# EAGLE board PCB (EAGLE 9.7.0)
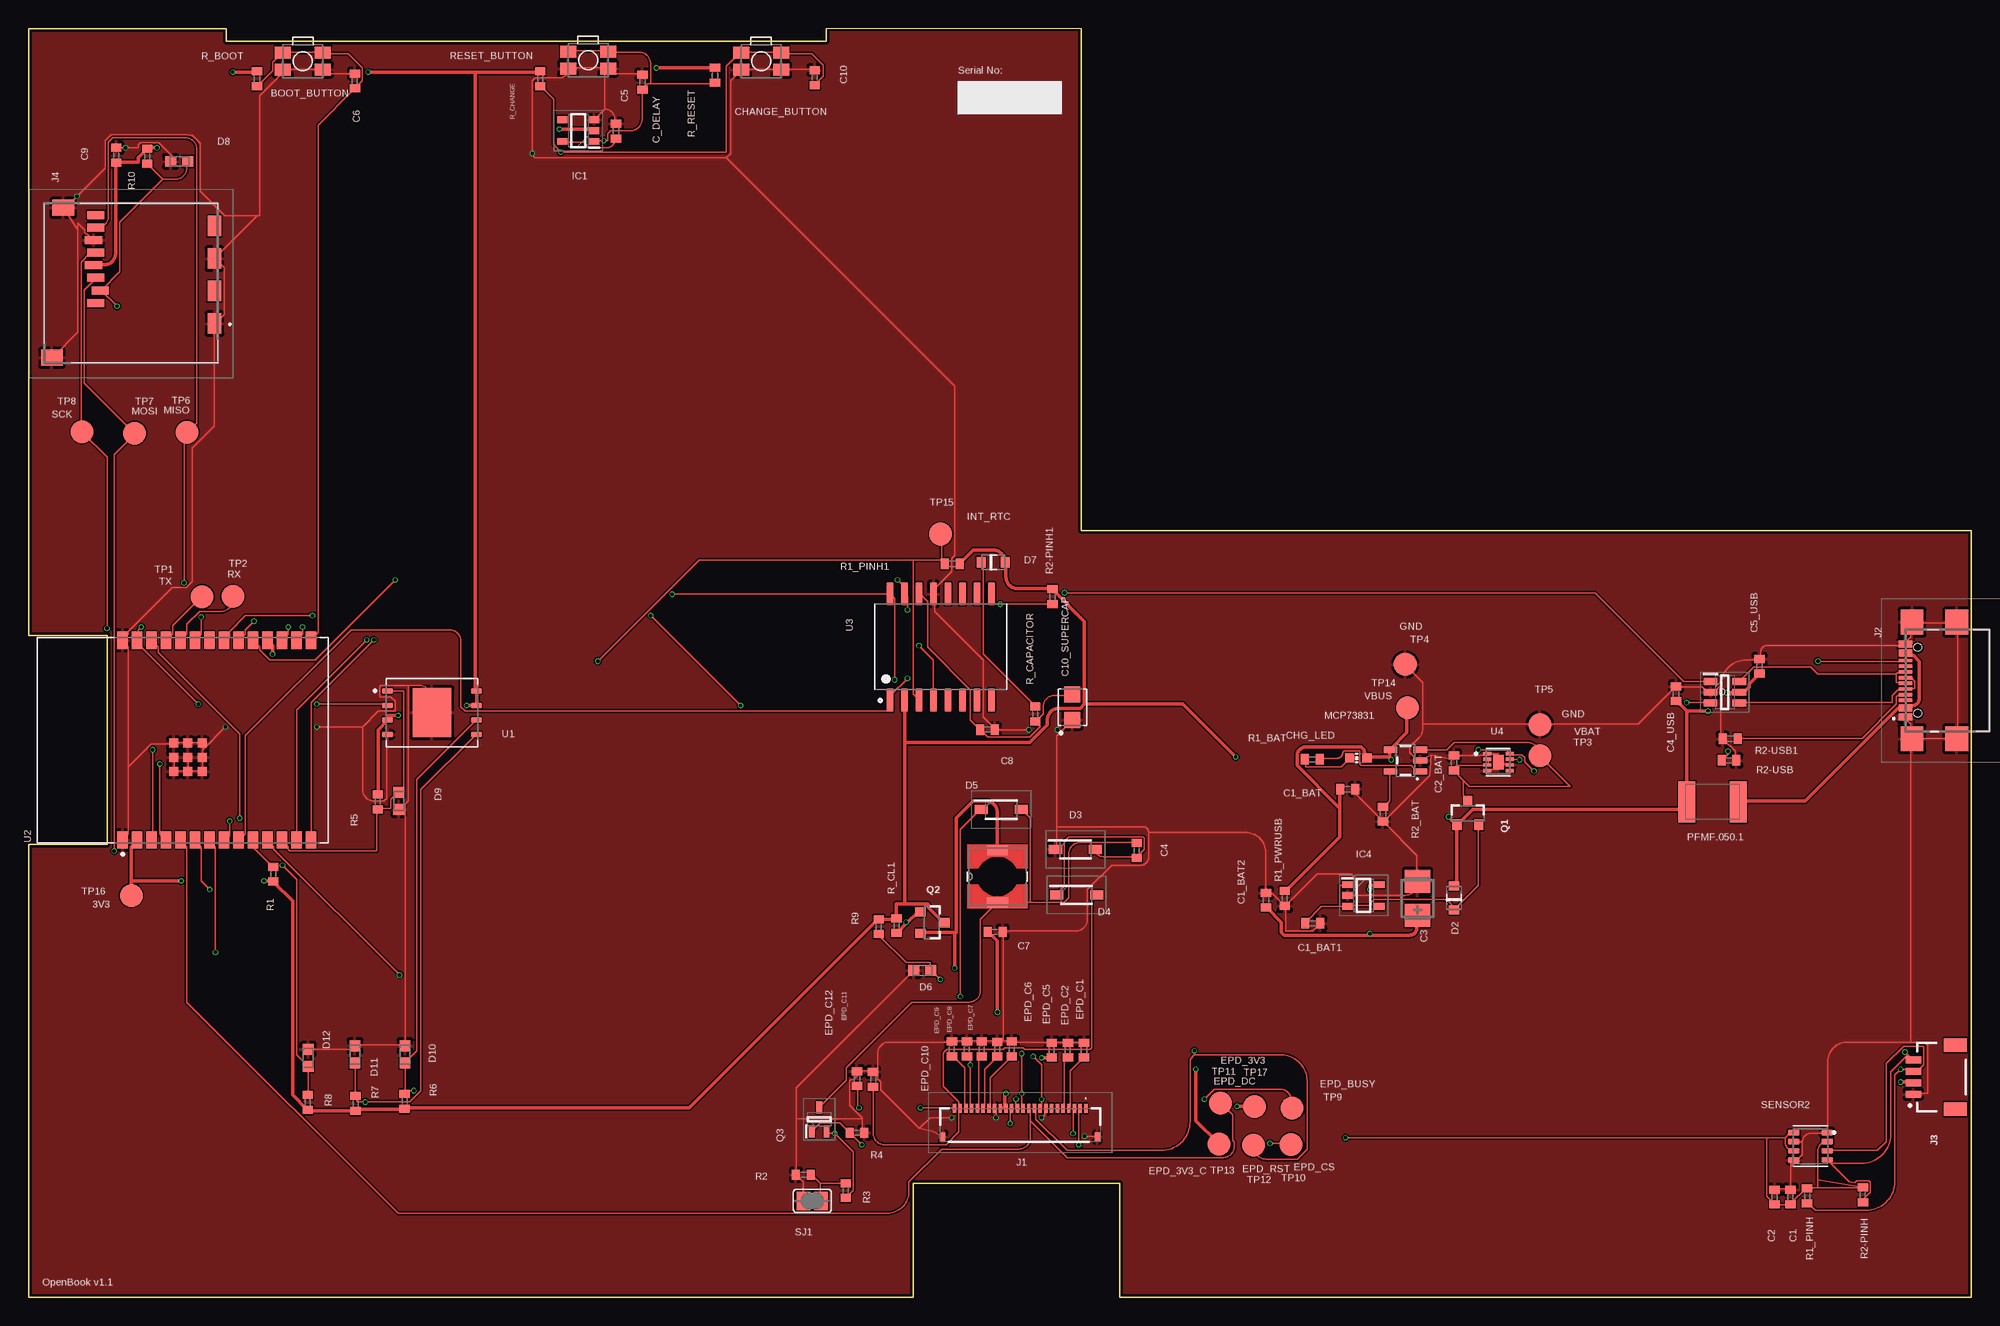
[diagram p0: board, top side]
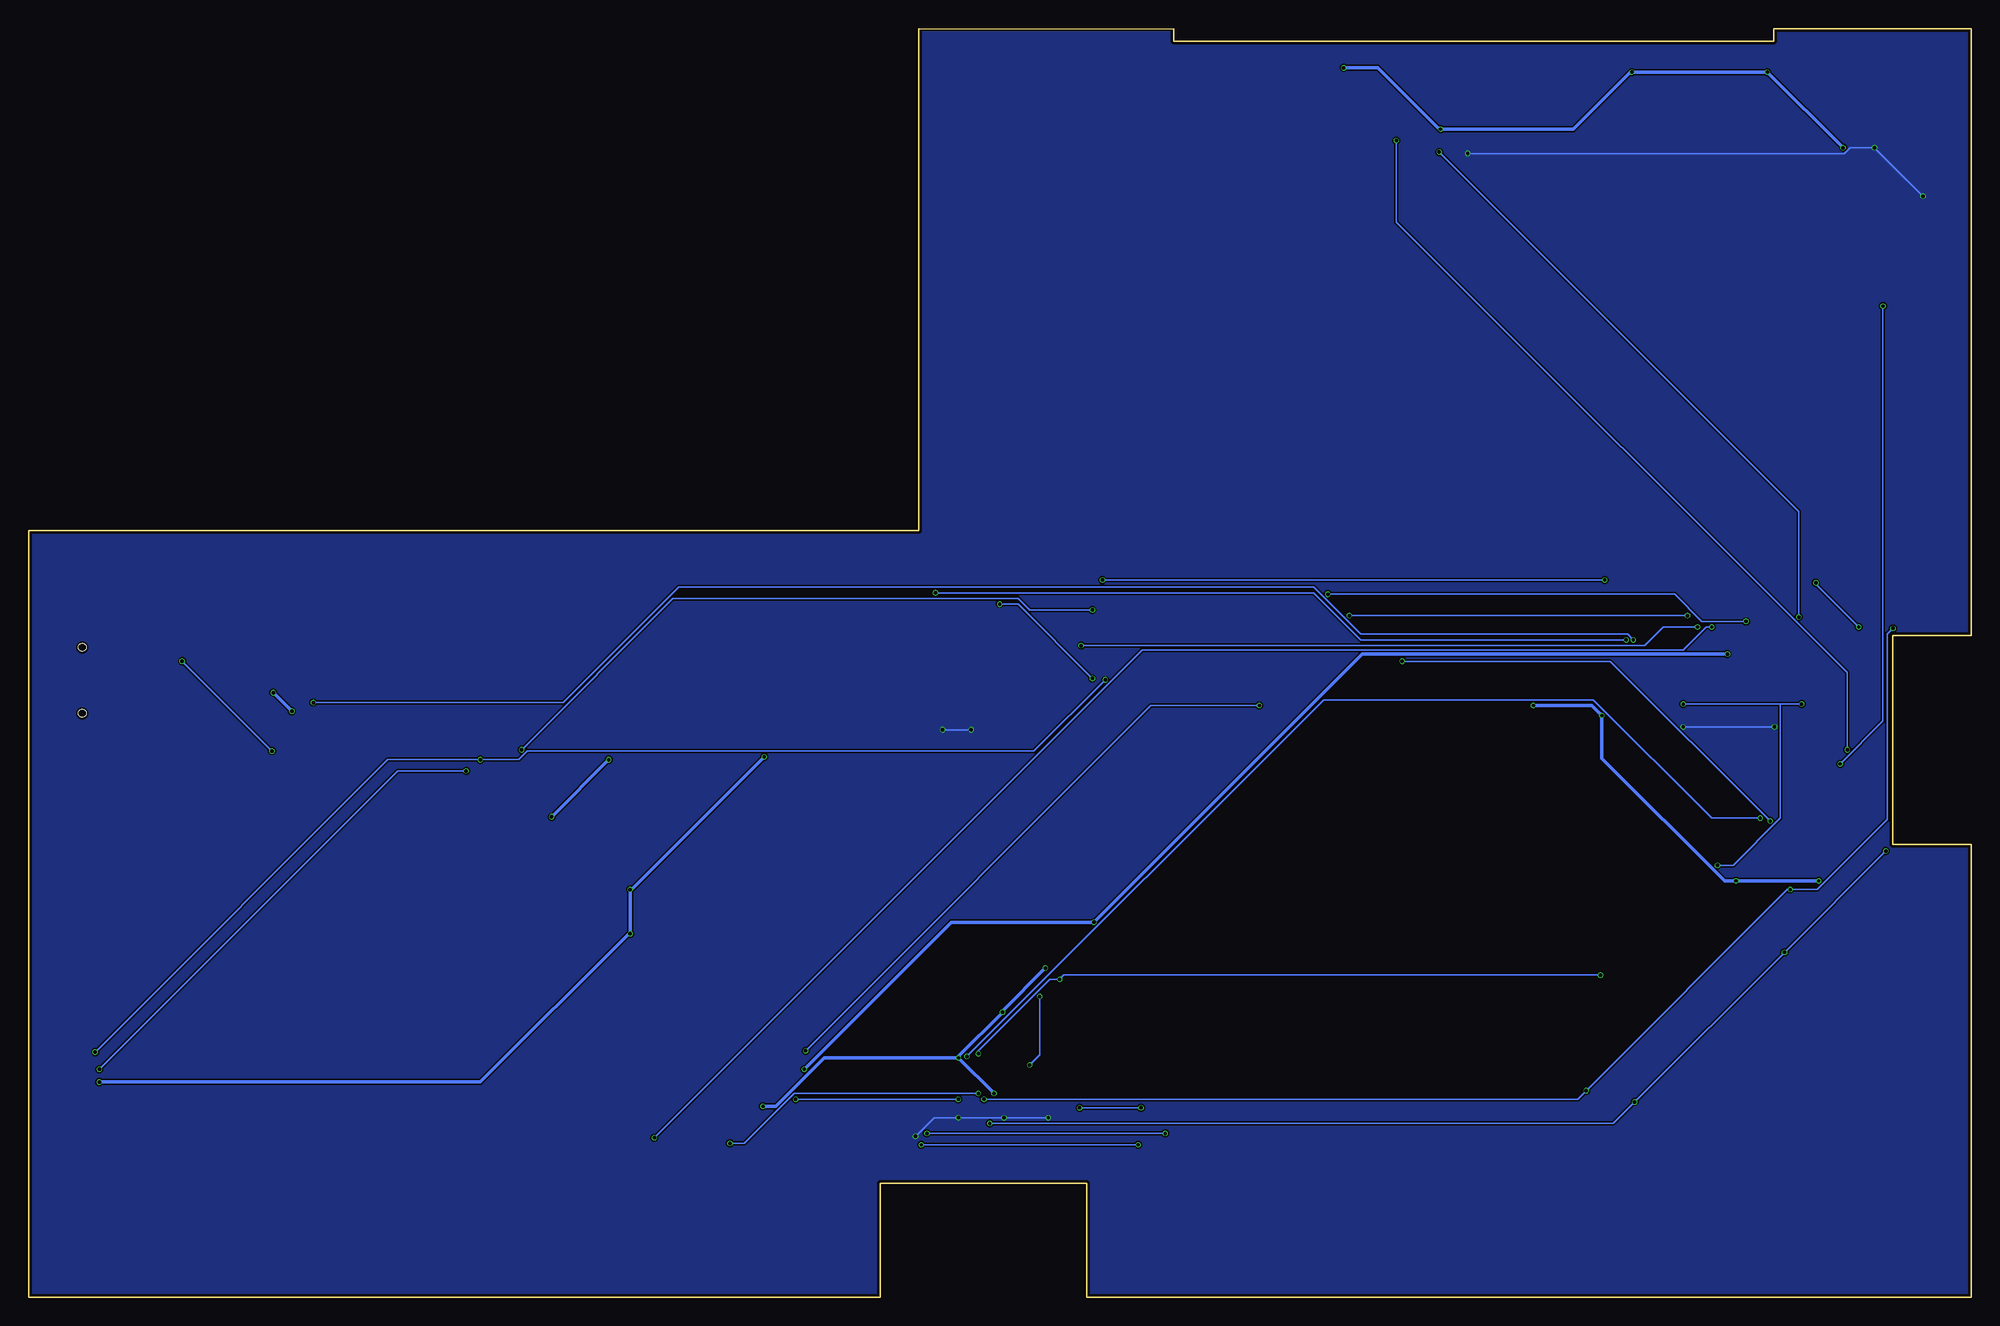
[diagram p1: board, bottom side, seen from below]

Size 170.2 x 111.2 mm. Coordinates in mm from the lower left corner, seen from the top.
Outline: 92.2,111.2 69.9,111.2 69.9,110.1 17.3,110.1 17.3,111.2 0,111.2 0,58 6.9,58 6.9,39.7 0,39.7 0,0 77.5,0 77.5,10 95.6,10 95.6,0 170.2,0 170.2,67.2 92.2,67.2 92.2,111.2
Copper layers (1*16): Top 0.035mm / dielectric 1.6mm / Bottom 0.035mm
Design rules "jlcpcb-2layers.dru *": minimum track width 0.15mm, minimum drill 0.3mm, track to track 5mil, track to pad 5mil, pad to pad 5mil, via to via 5mil, smd to smd 5mil, copper to edge 0.2mm, drill to drill 6mil, minimum pad ring 10mil, minimum via ring 3mil, stop-mask expansion 4mil, vias tented up to drill 0mil, thermal gap 10mil
Net classes: 3 alimentare: width 0.3 mm

## Footprints (pad centres in the part's own frame; a part is rotated, then mirrored left to right if it is on the bottom)
MYBUTTON = smd 1.4 x 1.05: 1 1.75,0.75; 2 -1.75,0.75; 3 -1.75,-0.75; 4 1.75,-0.75
EAGLE-LTSPICE_C0402 = smd 0.7 x 0.9: 1 -0.65,0; 2 0.65,0
RCL_CT3528 = smd 2 x 2.2: + -1.5,0; - 1.5,0
CAPCP3225X100N = smd 1.4 x 1.4: 1 -1.1,0; 2 1.1,0
ADAFRUIT_CHIP-LED0603 = smd 0.8 x 0.8: A 0,-0.75; C 0,0.75
SOT95P280X145-6N = smd 1.2 x 0.6: 1 -1.25,0.95; 2 -1.25,0; 3 -1.25,-0.95; 4 1.25,-0.95; 5 1.25,0; 6 1.25,0.95
ESP32_WROVER_AVX---SD0805S020S1R0_AVX_SD0805S020S1R0_0 = smd 0.8 x 0.9: 1 -1.05,0; 2 1.05,0
SOD3716X135N = smd 1.15 x 0.8: 1 -1.75,0; 2 1.75,0
DIOC1608X36N = smd 0.97 x 0.94: 1 -0.75,0; 2 0.75,0
SOT95P280X125-5N = smd 0.9 x 0.6: 1 -1.4,0.95; 2 -1.4,0; 3 -1.4,-0.95; 4 1.4,-0.95; 5 1.4,0.95
SOT95P280X120-5N = smd 0.9 x 0.6: 1 -1.4,0.95; 2 -1.4,0; 3 -1.4,-0.95; 4 1.4,-0.95; 5 1.4,0.95
FH34SRJ24S05SH99 = smd 0.3 x 0.8: 1 5.75,1.45; 2 5.25,1.45; 3 4.75,1.45; 4 4.25,1.45; 5 3.75,1.45; 6 3.25,1.45; 7 2.75,1.45; 8 2.25,1.45; 9 1.75,1.45; 10 1.25,1.45; 11 0.75,1.45; 12 0.25,1.45; 13 -0.25,1.45; 14 -0.75,1.45; 15 -1.25,1.45; 16 -1.75,1.45; 17 -2.25,1.45; 18 -2.75,1.45; 19 -3.25,1.45; 20 -3.75,1.45; 21 -4.25,1.45; 22 -4.75,1.45; 23 -5.25,1.45; 24 -5.75,1.45 | smd 0.4 x 0.8: MP1 6.75,-1.05; MP2 -6.75,-1.05
SAMACSYS_PARTS_USB4110GFA = smd 0.3 x 1.15: A1 -3.35,3.678; A4 -2.55,3.678; A5 -1.25,3.678; A6 -0.25,3.678; A7 0.25,3.678; A8 1.25,3.678; A9 2.55,3.678; A12 3.35,3.678; B1 3.05,3.678; B4 2.25,3.678; B5 1.75,3.678; B6 0.75,3.678; B7 -0.75,3.678; B8 -1.75,3.678; B9 -2.25,3.678; B12 -3.05,3.678 | smd 2.18 x 2: MP1 -5.11,-0.827; MP2 5.11,-0.827; MP3 -5.11,3.103; MP4 5.11,3.103 | hole 0.65: -2.89,2.603; 2.89,2.603
JST04_1MM_RA = smd 0.6 x 1.35: 1 -1.5,0; 2 -0.5,0; 3 0.5,0; 4 1.5,0 | smd 1.2 x 2: NC1 2.8,-3.675; NC2 -2.8,-3.675
112ATAARR03ATTEND = smd 1.8 x 1.2: G1 10.6,10.4; G2 4.9,10.4; S1 7.75,10.4; S2 2.05,10.4 | smd 1.4 x 1.9: G3 13.6,-3.85; G4 0.45,-2.85 | smd 0.7 x 1.5: P1 8.8,0; P2 7.7,0.4; P3 6.6,0; P4 5.5,-0.2; P5 4.4,0; P6 3.3,-0.2; P7 2.2,0; P8 1.1,0
IND_4828-WE-TPC_WRE = smd 0.914 x 1.905: 1 -2.286,0 | smd 0.914 x 1.778: 2 2.286,0
ESP32_WROVER_SPARKFUN-IC-POWER_SOT23-5 = smd 0.55 x 1.2: 1 -0.95,-1.3; 2 0,-1.3; 3 0.95,-1.3; 4 0.95,1.3; 5 -0.95,1.3
ESP32C6_VARISTOR_CT/CN1812 = smd 1.5 x 3.6: 1 -2.25,0; 2 2.25,0
ESP32_WROVER_SPARKFUN-DISCRETESEMI_SOT23-3 = smd 0.8 x 0.9: 1 -0.95,-1; 2 0.95,-1; 3 0,1.1
SOT65P210X110-3N = smd 1.05 x 0.5: 1 -1.05,0.65; 2 -1.05,-0.65; 3 1.05,0
ESP32_WROVER_EAGLE-LTSPICE_R0402 = smd 0.7 x 0.9: 1 -0.65,0; 2 0.65,0
ESP32_WROVER_BME680_PSON80P300X300X100-8N = smd 1.016 x 0.5: 1 1.458,1.2; 2 1.458,0.4; 3 1.458,-0.4; 4 1.458,-1.2; 5 -1.458,-1.22; 6 -1.458,-0.4; 7 -1.458,0.4; 8 -1.458,1.2
SJ = smd 1.168 x 1.6: 1 -0.762,0; 2 0.762,0
TP20R = smd 2 x 2: TP 0,0
SON127P600X800X80-9N = smd 0.94 x 0.44: 1 -3.895,1.905; 2 -3.895,0.635; 3 -3.895,-0.635; 4 -3.895,-1.905; 5 3.895,-1.905; 6 3.895,-0.635; 7 3.895,0.635; 8 3.895,1.905 | smd 3.4 x 4.3: 9 0,0
XCVR_ESP32-C6-WROOM-1-N8 = smd 1.5 x 0.9: 1 -8.75,5.26; 2 -8.75,3.99; 3 -8.75,2.72; 4 -8.75,1.45; 5 -8.75,0.18; 6 -8.75,-1.09; 7 -8.75,-2.36; 8 -8.75,-3.63; 9 -8.75,-4.9; 10 -8.75,-6.17; 11 -8.75,-7.44; 12 -8.75,-8.71; 13 -8.75,-9.98; 14 -8.75,-11.25; 15 8.75,-11.25; 16 8.75,-9.98; 17 8.75,-8.71; 18 8.75,-7.44; 19 8.75,-6.17; 20 8.75,-4.9; 21 8.75,-3.63; 22 8.75,-2.36; 23 8.75,-1.09; 24 8.75,0.18; 25 8.75,1.45; 26 8.75,2.72; 27 8.75,3.99; 28 8.75,5.26 | smd 0.8 x 0.8: 29_1 -2.755,0.79; 29_2 -1.505,0.79; 29_3 -0.255,0.79; 29_4 -2.755,-0.46; 29_5 -1.505,-0.46; 29_6 -0.255,-0.46; 29_7 -2.755,-1.71; 29_8 -1.505,-1.71; 29_9 -0.255,-1.71
SOIC127P1032X265-16N = smd 2.05 x 0.59: 1 -4.655,4.445; 2 -4.655,3.175; 3 -4.655,1.905; 4 -4.655,0.635; 5 -4.655,-0.635; 6 -4.655,-1.905; 7 -4.655,-3.175; 8 -4.655,-4.445; 9 4.655,-4.445; 10 4.655,-3.175; 11 4.655,-1.905; 12 4.655,-0.635; 13 4.655,0.635; 14 4.655,1.905; 15 4.655,3.175; 16 4.655,4.445
SON50P200X200X80-9N = smd 0.76 x 0.27: 1 -0.985,0.75; 2 -0.985,0.25; 3 -0.985,-0.25; 4 -0.985,-0.75; 5 0.985,-0.75; 6 0.985,-0.25; 7 0.985,0.25; 8 0.985,0.75 | smd 0.9 x 1.3: 9 0,0

## Placement (x,y rotation side)
BOOT_BUTTON  BUTTON_CUSYOMV1.  [MYBUTTON]  24.03,108.34 180 top
C1  100nF  [EAGLE-LTSPICE_C0402]  154.34,8.8 90 top
C1_BAT  4.7uF  [EAGLE-LTSPICE_C0402]  115.55,44.54 0 top
C1_BAT1  4.7uF  [EAGLE-LTSPICE_C0402]  112.51,32.79 0 top
C1_BAT2  4.7uF  [EAGLE-LTSPICE_C0402]  108.4,34.81 90 top
C2  100nF  [EAGLE-LTSPICE_C0402]  152.95,8.8 90 top
C2_BAT  4.7uF  [EAGLE-LTSPICE_C0402]  124.87,46.85 90 top
C3  100uF TANT  [RCL_CT3528]  121.67,34.97 90 top
C4  4.7uF/25V  [EAGLE-LTSPICE_C0402]  97.07,39.17 90 top
C4_USB  100nF  [EAGLE-LTSPICE_C0402]  144.32,52.91 90 top
C5  1uF  [EAGLE-LTSPICE_C0402]  53.78,106.51 90 top
C5_USB  4.7uF  [EAGLE-LTSPICE_C0402]  151.63,55.31 90 top
C6  100nF  [EAGLE-LTSPICE_C0402]  28.59,106.6 90 top
C7  10uF  [EAGLE-LTSPICE_C0402]  84.67,32.04 0 top
C8  100nF  [EAGLE-LTSPICE_C0402]  84,49.76 0 top
C9  100nF  [EAGLE-LTSPICE_C0402]  7.68,100.09 90 top
C10  100nF  [EAGLE-LTSPICE_C0402]  68.87,106.9 90 top
C10_SUPERCAP  CPH3225A.  [CAPCP3225X100N]  91.44,51.72 90 top
C_DELAY  100nF  [EAGLE-LTSPICE_C0402]  51.46,102.2 90 top
CHANGE_BUTTON  BUTTON_CUSYOMV1.  [MYBUTTON]  64.18,108.33 180 top
CHG_LED  [ADAFRUIT_CHIP-LED0603]  116.5,47.27 90 top
D1  USBLC6-2SC6Y  [SOT95P280X145-6N]  148.6,53.04 0 top
D2  ESP32_WROVER_AVX---SD0805S020S1R0_AVX_SD0805S020S1R0_0_0AVX_SD0805S020S1R0_0_0  [ESP32_WROVER_AVX---SD0805S020S1R0_AVX_SD0805S020S1R0_0]  124.87,35.01 90 top
D3  MBR0530  [SOD3716X135N]  91.71,39.26 0 top
D4  MBR0530  [SOD3716X135N]  91.81,35.27 0 top
D5  MBR0530  [SOD3716X135N]  85.21,42.75 0 top
D6  PGB1010603MR.  [DIOC1608X36N]  78.3,28.66 0 top
D7  ESP32_WROVER_AVX---SD0805S020S1R0_AVX_SD0805S020S1R0_0_0AVX_SD0805S020S1R0_0_0  [ESP32_WROVER_AVX---SD0805S020S1R0_AVX_SD0805S020S1R0_0]  84.5,64.42 0 top
D8  PGB1010603MR.  [DIOC1608X36N]  13.2,99.55 0 top
D9  PGB1010603MR.  [DIOC1608X36N]  32.43,43.5 90 top
D10  PGB1010603MR.  [DIOC1608X36N]  32.98,21.3 270 top
D11  PGB1010603MR.  [DIOC1608X36N]  28.59,21.3 270 top
D12  PGB1010603MR.  [DIOC1608X36N]  24.5,21 270 top
EPD_C1  1uF/50V  [EAGLE-LTSPICE_C0402]  92.46,21.68 90 top
EPD_C2  1uF/50V  [EAGLE-LTSPICE_C0402]  91.05,21.68 90 top
EPD_C5  0.1uF/50V  [EAGLE-LTSPICE_C0402]  89.64,21.68 90 top
EPD_C6  1uF/50V  [EAGLE-LTSPICE_C0402]  86.13,21.78 90 top
EPD_C7  1uF/50V  [EAGLE-LTSPICE_C0402]  84.85,21.76 90 top
EPD_C8  1uF/50V  [EAGLE-LTSPICE_C0402]  83.51,21.78 90 top
EPD_C9  1uF/50V  [EAGLE-LTSPICE_C0402]  82.2,21.78 90 top
EPD_C10  1uF/50V  [EAGLE-LTSPICE_C0402]  80.89,21.78 90 top
EPD_C11  1uF/50V  [EAGLE-LTSPICE_C0402]  73.98,19.12 90 top
EPD_C12  1uF/50V  [EAGLE-LTSPICE_C0402]  72.57,19.18 90 top
IC1  BD5229G-TR3D  [SOT95P280X125-5N]  48.16,102.26 180 top
IC4  XC6220A331MR-G  [SOT95P280X120-5N]  116.95,35.22 0 top
J1  FH34SRJ-24S-0.5SH_99_.  [FH34SRJ24S05SH99]  86.87,15.11 0 top
J2  SAMACSYS_PARTS_USB4110-GF-A  [SAMACSYS_PARTS_USB4110GFA]  168.1,54.07 90 top
J3  QWIIC_RIGHT_ANGLE  [JST04_1MM_RA]  165.11,19.31 90 top
J4  112A-TAAR-R03_ATTEND  [112ATAARR03ATTEND]  5.89,95.95 270 top
L1  68uH  [IND_4828-WE-TPC_WRE]  84.88,36.89 90 top
MCP73831  ESP32_WROVER_SPARKFUN-IC-POWER_MCP73831  [ESP32_WROVER_SPARKFUN-IC-POWER_SOT23-5]  120.62,47.05 90 top
PFMF.050.1  ESP32C6_VARISTORCN1812  [ESP32C6_VARISTOR_CT/CN1812]  147.52,43.43 180 top
Q1  20V/4.2A/52mΩ/1.4W  [ESP32_WROVER_SPARKFUN-DISCRETESEMI_SOT23-3]  126.08,42.42 0 top
Q2  20V/4.2A/52mΩ/1.4W  [ESP32_WROVER_SPARKFUN-DISCRETESEMI_SOT23-3]  79.13,32.85 270 top
Q3  SI1308EDL-T1-GE3  [SOT65P210X110-3N]  69.26,15.61 90 top
R1  10K  [ESP32_WROVER_EAGLE-LTSPICE_R0402]  21.44,37.09 90 top
R1_BAT  200  [ESP32_WROVER_EAGLE-LTSPICE_R0402]  112.45,47.16 0 top
R1_PINH  10K  [ESP32_WROVER_EAGLE-LTSPICE_R0402]  155.8,8.9 90 top
R1_PINH1  10K  [ESP32_WROVER_EAGLE-LTSPICE_R0402]  80.92,64.29 0 top
R1_PWRUSB  100K  [ESP32_WROVER_EAGLE-LTSPICE_R0402]  110.05,34.96 90 top
R2  2.2  [ESP32_WROVER_EAGLE-LTSPICE_R0402]  67.87,10.75 0 top
R2-PINH  10K  [ESP32_WROVER_EAGLE-LTSPICE_R0402]  160.69,9 90 top
R2-PINH1  10K  [ESP32_WROVER_EAGLE-LTSPICE_R0402]  89.7,61.42 90 top
R2-USB  5k1  [ESP32_WROVER_EAGLE-LTSPICE_R0402]  148.96,47.07 0 top
R2-USB1  5k1  [ESP32_WROVER_EAGLE-LTSPICE_R0402]  149.06,48.96 0 top
R2_BAT  2K  [ESP32_WROVER_EAGLE-LTSPICE_R0402]  118.65,42.35 90 top
R3  0.47  [ESP32_WROVER_EAGLE-LTSPICE_R0402]  71.59,9.37 90 top
R4  10K  [ESP32_WROVER_EAGLE-LTSPICE_R0402]  72.57,14.42 0 top
R5  10K  [ESP32_WROVER_EAGLE-LTSPICE_R0402]  30.6,43.43 90 top
R6  10K  [ESP32_WROVER_EAGLE-LTSPICE_R0402]  32.94,17.2 270 top
R7  10K  [ESP32_WROVER_EAGLE-LTSPICE_R0402]  28.65,17 270 top
R8  10K  [ESP32_WROVER_EAGLE-LTSPICE_R0402]  24.46,17.1 270 top
R9  10K  [ESP32_WROVER_EAGLE-LTSPICE_R0402]  74.48,32.5 90 top
R10  10K  [ESP32_WROVER_EAGLE-LTSPICE_R0402]  10.39,100 90 top
R_BOOT  10K  [ESP32_WROVER_EAGLE-LTSPICE_R0402]  20.01,106.8 90 top
R_CAPACITOR  15  [ESP32_WROVER_EAGLE-LTSPICE_R0402]  88.19,51.12 90 top
R_CHANGE  10K  [ESP32_WROVER_EAGLE-LTSPICE_R0402]  44.82,106.8 90 top
R_CL1  10K  [ESP32_WROVER_EAGLE-LTSPICE_R0402]  76.04,32.58 90 top
R_RESET  10K  [ESP32_WROVER_EAGLE-LTSPICE_R0402]  60.13,107.1 90 top
RESET_BUTTON  BUTTON_CUSYOMV1.  [MYBUTTON]  49.03,108.43 180 top
SENSOR2  ESP32_WROVER_BME680_BME680  [ESP32_WROVER_BME680_PSON80P300X300X100-8N]  156.1,13.26 0 top
SJ1  [SJ]  68.66,8.46 0 top
TP1  TPTP20R  [TP20R]  15.2,61.42 0 top
TP2  TPTP20R  [TP20R]  17.9,61.44 0 top
TP3  TPTP20R  [TP20R]  132.4,47.46 0 top
TP4  TPTP20R  [TP20R]  120.6,55.48 0 top
TP5  TPTP20R  [TP20R]  132.4,50.2 0 top
TP6  TPTP20R  [TP20R]  13.9,75.82 0 top
TP7  TPTP20R  [TP20R]  9.3,75.74 0 top
TP8  TPTP20R  [TP20R]  4.7,75.86 0 top
TP9  TPTP20R  [TP20R]  110.7,16.58 0 top
TP10  TPTP20R  [TP20R]  110.6,13.4 0 top
TP11  TPTP20R  [TP20R]  104.4,17.02 0 top
TP12  TPTP20R  [TP20R]  107.3,13.34 0 top
TP13  TPTP20R  [TP20R]  104.3,13.46 0 top
TP14  TPTP20R  [TP20R]  120.8,51.68 0 top
TP15  TPTP20R  [TP20R]  79.9,66.9 0 top
TP16  TPTP20R  [TP20R]  9,35.22 0 top
TP17  TPTP20R  [TP20R]  107.4,16.74 0 top
U1  W25Q512JVEIQ  [SON127P600X800X80-9N]  35.34,51.25 0 top
U2  ESP32-C6-WROOM-1-N8  [XCVR_ESP32-C6-WROOM-1-N8]  13.5,48.84 90 top
U3  DS3231SN#  [SOIC127P1032X265-16N]  79.91,57.01 90 top
U4  MAX17048G+T10  [SON50P200X200X80-9N]  128.76,46.91 0 top

## Library data of the parts
BOOT_BUTTON C1 C1_BAT C1_BAT1 C1_BAT2 C2 C2_BAT C3 C4 C4_USB C5 C5_USB C6-C8 C10 C10_SUPERCAP C_DELAY CHANGE_BUTTON CHG_LED D2 D6 D8-D12 EPD_C1 EPD_C2 EPD_C5-EPD_C12 IC1 J1 J3 PFMF.050.1 R1 R1_BAT R1_PINH R1_PINH1 R1_PWRUSB R2 R2-PINH R2-PINH1 R2-USB R2-USB1 R2_BAT R3-R10 R_BOOT R_CAPACITOR R_CHANGE R_CL1 R_RESET RESET_BUTTON SJ1 = DeskAssistant v19 v1
C9 = DeskAssistant v19 v1; SPICEMODEL: NONE; SPICEPREFIX: C
D1 = DeskAssistant v19 v1; AVAILABILITY: In Stock; CHECK_PRICES: https://www.snapeda.com/parts/USBLC6-2SC6Y/STMicroelectronics/view-part/?ref=eda; DESCRIPTION: 17V Clamp 5A (8/20µs) Ipp Tvs Diode Surface Mount SOT-23-6; MF: STMicroelectronics; MP: USBLC6-2SC6Y; PACKAGE: SOT-23-6 STMicroelectronics; PRICE: None; SNAPEDA_LINK: https://www.snapeda.com/parts/USBLC6-2SC6Y/STMicroelectronics/view-part/?ref=snap
D3-D5 = DeskAssistant v19 v1; AVAILABILITY: In Stock; CHECK_PRICES: https://www.snapeda.com/parts/MBR0530/Onsemi/view-part/?ref=eda; DESCRIPTION: Diode Schottky 30 V 500mA Surface Mount SOD-123; MF: ON Semiconductor; MP: MBR0530; PACKAGE: SOD-123-2 ON Semiconductor; PRICE: None; PURCHASE-URL: https://www.snapeda.com/api/url_track_click_mouser/?unipart_id=179458&manufacturer=ON Semiconductor&part_name=MBR0530&search_term=None; SNAPEDA_LINK: https://www.snapeda.com/parts/MBR0530/Onsemi/view-part/?ref=snap
D7 = DeskAssistant v19 v1; D7: SD0805S020S1R0
IC4 = DeskAssistant v19 v1; DESCRIPTION: LDO Voltage Regulators; HEIGHT: 1.2mm; MANUFACTURER_NAME: Torex; MANUFACTURER_PART_NUMBER: XC6220A331MR-G; MOUSER_PART_NUMBER: 865-XC6220A331MR-G; MOUSER_PRICE-STOCK: https://www.mouser.co.uk/ProductDetail/Torex-Semiconductor/XC6220A331MR-G?qs=AsjdqWjXhJ8ZSWznL1J0gg%3D%3D
J2 = DeskAssistant v19 v1; DESCRIPTION: CONN USB 2.0 TYPE-C R/A SMT; HEIGHT: 3.26mm; MANUFACTURER_NAME: GCT (GLOBAL CONNECTOR TECHNOLOGY); MANUFACTURER_PART_NUMBER: USB4110-GF-A; MOUSER_PART_NUMBER: 640-USB4110-GF-A; MOUSER_PRICE-STOCK: https://www.mouser.co.uk/ProductDetail/GCT/USB4110-GF-A?qs=KUoIvG%2F9IlYiZvIXQjyJeA%3D%3D
J4 = DeskAssistant v19 v1; DESCRIPTION: Micro SD Card Socket, Push-Push Type, Top Mount, SMT, H=1.83mm, 10u; HEIGHT: 1.9mm; MANUFACTURER_NAME: ATTEND; MANUFACTURER_PART_NUMBER: 112A-TAAR-R03 ATTEND
L1 = DeskAssistant v19 v1; IDK: 68uH
MCP73831 = DeskAssistant v19 v1; PROD_ID: IC-09995
Q1 = DeskAssistant v19 v1; A: DMG2305UX-7
Q2 = DeskAssistant v19 v1; D: DMG2305UX-7
Q3 = DeskAssistant v19 v1; AVAILABILITY: In Stock; CHECK_PRICES: https://www.snapeda.com/parts/SI1308EDL-T1-GE3/Vishay+Siliconix/view-part/?ref=eda; DESCRIPTION: Si1308EDL-T1-GE3 N-channel MOSFET Transistor, 1.5 A, 30 V, 3-Pin SC-70 | Siliconix / Vishay SI1308EDL-T1-GE3; MF: Vishay Siliconix; MP: SI1308EDL-T1-GE3; PACKAGE: SOT-323 Vishay Semiconductor; PRICE: None; PURCHASE-URL: https://www.snapeda.com/api/url_track_click_mouser/?unipart_id=274603&manufacturer=Vishay Siliconix&part_name=SI1308EDL-T1-GE3&search_term=None; SNAPEDA_LINK: https://www.snapeda.com/parts/SI1308EDL-T1-GE3/Vishay+Siliconix/view-part/?ref=snap
SENSOR2 = DeskAssistant v19 v1; ATR: BME688; AVAILABILITY: Unavailable; B: BME688; DESCRIPTION: Integrated Environmental Unit; MF: Bosch Sensortec; MP: BME680; PACKAGE: LGA-8 Bosch Tools; PRICE: None
TP1 = DeskAssistant v19 v1; 3-TP1: TX; 3D_TP1: RX
TP2 = DeskAssistant v19 v1; 3D_TP2: RX
TP3 = DeskAssistant v19 v1; 3D_TP3: VBAT
TP4 = DeskAssistant v19 v1; 3D_TP4: GND
TP5 = DeskAssistant v19 v1; 3D_TP5: GND
TP6 = DeskAssistant v19 v1; 3S_TP6: MISO
TP7 = DeskAssistant v19 v1; 3D_TP7: MOSI
TP8 = DeskAssistant v19 v1; 3D_TP8: SCK
TP9 = DeskAssistant v19 v1; 3D_TP9: EPD_BUSY
TP10 = DeskAssistant v19 v1; 3D_TP10: EPD_CS
TP11 = DeskAssistant v19 v1; 3D_TP11: EPD_DC
TP12 = DeskAssistant v19 v1; 3D_TP12: EPD_RST
TP13 = DeskAssistant v19 v1; 3D_TP13: EPD_3V3_C
TP14 = DeskAssistant v19 v1; 3D_TP14: VBUS
TP15 = DeskAssistant v19 v1; 3D_TP15: INT_RTC
TP16 = DeskAssistant v19 v1; 3D_TP16: 3V3
TP17 = DeskAssistant v19 v1; 3D_TP17: EPD_3V3
U1 = DeskAssistant v19 v1; AVAILABILITY: In Stock; CHECK_PRICES: https://www.snapeda.com/parts/W25Q512JVEIQ/Winbond+Electronics/view-part/?ref=eda; DESCRIPTION: FLASH - NOR Memory IC 512Mb (64M x 8) SPI - Quad I/O 133 MHz 8-WSON (8x6); MF: Winbond Electronics; MP: W25Q512JVEIQ; PACKAGE: Package; PRICE: None; SNAPEDA_LINK: https://www.snapeda.com/parts/W25Q512JVEIQ/Winbond+Electronics/view-part/?ref=snap
U2 = DeskAssistant v19 v1; AVAILABILITY: In Stock; CHECK_PRICES: https://www.snapeda.com/parts/ESP32-C6-WROOM-1-N8/Espressif+Systems/view-part/?ref=eda; DESCRIPTION: Multiprotocol Modules ESP32-C6 module, Wi-Fi 6 in 2.4 GHz band, Bluetooth 5, Zigbee 3.0 and Thread. ESP34-WROOM Compatible - ENGINEERING SAMPLE; MF: Espressif Systems; MP: ESP32-C6-WROOM-1-N8; PACKAGE: None; PRICE: None; SNAPEDA_LINK: https://www.snapeda.com/parts/ESP32-C6-WROOM-1-N8/Espressif+Systems/view-part/?ref=snap
U3 = DeskAssistant v19 v1; AVAILABILITY: In Stock; CHECK_PRICES: https://www.snapeda.com/parts/DS3231SN%23/Analog+Devices/view-part/?ref=eda; DESCRIPTION: Extremely Accurate I²C-Integrated RTC/TCXO/Crystal; MF: Analog Devices; MP: DS3231SN#; PACKAGE: SOIC-16 Maxim; PRICE: None; PURCHASE-URL: https://www.snapeda.com/api/url_track_click_mouser/?unipart_id=99048&manufacturer=Analog Devices&part_name=DS3231SN#&search_term=None; SNAPEDA_LINK: https://www.snapeda.com/parts/DS3231SN%23/Analog+Devices/view-part/?ref=snap
U4 = DeskAssistant v19 v1; AVAILABILITY: In Stock; CHECK_PRICES: https://www.snapeda.com/parts/MAX17048G+T10/Analog+Devices/view-part/?ref=eda; DESCRIPTION: 3µA 1-Cell/2-Cell Fuel Gauge with ModelGauge; MF: Analog Devices; MP: MAX17048G+T10; PACKAGE: TDFN-8 Maxim; PRICE: None; PURCHASE-URL: https://www.snapeda.com/api/url_track_click_mouser/?unipart_id=329239&manufacturer=Analog Devices&part_name=MAX17048G+T10&search_term=None; SNAPEDA_LINK: https://www.snapeda.com/parts/MAX17048G+T10/Analog+Devices/view-part/?ref=snap

## Nets
3V3 [alimentare]: C1_BAT2.1 C3.+ C9.1 D7.2 IC1.2 IC4.5 J3.2 J4.P4 Q2.3 R1.1 R1_PINH1.2 R2-PINH1.2 R5.2 R6.2 R7.2 R8.2 R9.2 R10.2 R_BOOT.2 R_CHANGE.2 R_CL1.2 R_RESET.2 TP16.TP U1.3 U1.7 U1.8 U2.2 U3.2
32KHZ: R2-PINH1.1 U2.9 U3.1
DN: D1.4 J2.A7 J2.B7
DP: D1.6 J2.A6 J2.B6
EPD_3V3 [alimentare]: C7.1 EPD_C5.1 J1.15 J1.16 L1.2 Q2.2 TP17.TP
EPD_3V3_C [alimentare]: Q2.1 R_CL1.1 TP13.TP U2.18
EPD_BUSY: J1.9 TP9.TP U2.26
EPD_CS: D6.2 J1.12 R9.1 TP10.TP U2.11
EPD_DC: J1.11 TP11.TP U2.5
EPD_RST: J1.10 TP12.TP U2.21
FLASH_CS: D9.2 R5.1 U1.1 U2.12
GDR: J1.2 Q3.1 R4.1
GND: BOOT_BUTTON.1 BOOT_BUTTON.2 C1.2 C1_BAT1.2 C1_BAT2.2 C1_BAT.2 C2.2 C2_BAT.2 C3.- C4_USB.2 C5.2 C5_USB.2 C6.2 C7.2 C8.2 C9.2 C10.2 C10_SUPERCAP.1 C_DELAY.2 CHANGE_BUTTON.1 CHANGE_BUTTON.2 D1.2 D3.1 D6.1 D8.1 D9.1 D10.1 D11.1 D12.1 EPD_C1.2 EPD_C2.2 EPD_C5.2 EPD_C6.2 EPD_C7.2 EPD_C8.2 EPD_C9.2 EPD_C10.2 EPD_C11.2 EPD_C12.2 IC1.3 IC4.2 J1.8 J1.17 J1.MP1 J1.MP2 J2.A1 J2.A12 J2.B1 J2.B12 J2.MP1 J2.MP2 J2.MP3 J2.MP4 J3.1 J4.G1 J4.G2 J4.G3 J4.G4 J4.P6 MCP73831.2 R1_PWRUSB.1 R2-USB1.1 R2-USB.2 R2.1 R2_BAT.1 R4.2 RESET_BUTTON.1 RESET_BUTTON.2 SENSOR2.1 SENSOR2.5 SENSOR2.7 SJ1.1 TP4.TP TP5.TP U1.4 U1.9 U2.1 U2.28 U2.29_1 U2.29_2 U2.29_3 U2.29_4 U2.29_5 U2.29_6 U2.29_7 U2.29_8 U2.29_9 U3.13 U4.1 U4.4 U4.6 U4.9
GPIO8: R1.2 U2.10
I2C_PW: C1.1 C2.1 R1_PINH.2 R2-PINH.2 SENSOR2.2 SENSOR2.6 SENSOR2.8 U2.17
INT_RTC: R1_PINH1.1 TP15.TP U2.8 U3.3
IO/BOOT: BOOT_BUTTON.3 BOOT_BUTTON.4 C6.1 R_BOOT.1 U2.15
IO/CHANGE: C10.1 CHANGE_BUTTON.3 CHANGE_BUTTON.4 R_CHANGE.1 U2.23
MISO: D12.2 J4.P7 R8.1 TP6.TP U1.2 U2.27
MOSI: D11.2 J1.14 J4.P3 R7.1 TP7.TP U1.5 U2.7
N$2: C_DELAY.1 IC1.5
N$4: EPD_C12.1 J1.24
N$5: CHG_LED.C R1_BAT.1
N$6: EPD_C6.1 J1.18
N$7: D7.1 R_CAPACITOR.2
N$8: EPD_C8.1 J1.20
N$9: EPD_C1.1 J1.4
N$10: MCP73831.1 R1_BAT.2
N$12: MCP73831.5 R2_BAT.2
N$13: C4.1 D3.2 D4.1
N$16: EPD_C2.1 J1.5
N$18: EPD_C7.1 J1.19
N$19: EPD_C10.1 J1.22
N$20: C1_BAT1.1 D2.1 IC4.1 IC4.3 Q1.2
N$21: J2.A5 R2-USB1.2
N$29: J2.B5 R2-USB.1
PREVGH: D5.1 EPD_C9.1 J1.21
PREVGL: D4.2 EPD_C11.1 J1.23
RESE: J1.3 Q3.2 R3.1
RESE': R2.2 R3.2 SJ1.2
RESET: C5.1 IC1.1 R_RESET.1 RESET_BUTTON.3 RESET_BUTTON.4 U2.3
RTC_RST: U2.16 U3.4
RX: TP2.TP U2.24
SCK: D10.2 J1.13 J4.P5 R6.1 TP8.TP U1.6 U2.6
SCL: J3.4 R2-PINH.1 SENSOR2.4 U2.20 U3.16 U4.7
SDA: J3.3 R1_PINH.1 SENSOR2.3 U2.19 U3.15 U4.8
SRC: C4.2 D5.2 L1.1 Q3.3
SS_SD: D8.2 J4.P2 R10.1 U2.4
TX: TP1.TP U2.25
USB_D+: D1.1 U2.14
USB_D-: D1.3 U2.13
VBAT: C2_BAT.1 MCP73831.3 Q1.3 TP3.TP U4.2 U4.3
VBUS [alimentare]: C1_BAT.1 C4_USB.1 C5_USB.1 CHG_LED.A D1.5 D2.2 MCP73831.4 PFMF.050.1.2 Q1.1 R1_PWRUSB.2 TP14.TP
VRTC: C8.1 C10_SUPERCAP.2 R_CAPACITOR.1 U3.14
VUSB [alimentare]: J2.A4 J2.A9 J2.B4 J2.B9 PFMF.050.1.1

## Tracks (layer width: path | path; a pad name or v marks a point on that pad's centre or on a via)
3V3  (via drill 0.3)
  Top 0.3: 117.5,31.75 110,31.75 109.75,32 109.75,32.88 108.5,34.12 C1_BAT2.1 | C3.+ 121.62,33.38 121.62,32.4 arc-90 120.97,31.75 117.5,31.75 | v117.5,35.75 117.5,36.12 118.25,36.12 IC4.5 | v117.5,31.88 117.5,31.75 | v164,18.88 165,18.88 J3.2 | v17.88,107.38 20,107.38 R_BOOT.2 | v11.25,100.75 10.5,100.75 R10.2 10.38,100.62 9.62,99.88 9.62,99.5 7.75,99.5 C9.1 7.62,99.38 7.62,91.5 arc-90 6.62,90.5 5.75,90.5 J4.P4 | v29.75,107.38 39.12,107.38 | 39.12,107.38 44.75,107.38 R_CHANGE.2 | v46.5,102.38 49.5,102.38 IC1.2 | R_RESET.2 v55,107.75 | R1_PINH1.2 81.62,64.38 82.75,65.5 84.5,65.5 arc-90 85.5,64.5 D7.2 85.62,64.38 85.62,63.12 arc90 86.62,62.12 89.62,62.12 R2-PINH1.2 89.75,62 92.5,59.25 92.5,52 | 76.75,34.5 76,34.5 76,33.38 R_CL1.2 76,33.12 74.5,33.12 R9.2 74.38,33.12 57.88,16.62 33,16.62 R6.2 32.88,16.5 28.62,16.5 R7.2 28.62,16.38 24.5,16.38 R8.2 24.38,16.5 23.12,17.75 23.12,34.75 21.5,36.38 R1.1 21.38,36.5 v20.62,36.5 | 76.75,34.5 78.75,34.5 78.88,34.38 78.88,34.12 80.12,32.88 Q2.3 | 76.75,34.5 76.75,48.62 | 76.75,48.62 76.75,52.25 U3.2 | 92.5,52 92.12,51.62 90.25,51.62 arc90 89.25,50.62 89.25,50.16 87.71,48.62 76.75,48.62 | R5.2 30.62,44.12 30.62,49.75 31.38,50.5 U1.3 31.5,50.75 31.5,51 v32.38,51 | v38.38,51.88 39.12,51.88 U1.7 39.25,52 39.25,53.12 U1.8 39.12,53.25 39.12,107.38 | TP16.TP 9,36.5 | 9,36.5 9,39.5 9.5,40 U2.2 | v13.38,36.5 9,36.5 | v105.75,47.38 101.12,52 92.5,52
  Bottom 0.3: v164,18.88 130.62,18.88 117.62,31.88 v117.5,31.88 v117.5,35.75 117.38,35.75 v105.75,47.38 | v11.25,100.75 v17.88,107.38 v29.75,107.38 29.88,107.38 34.88,102.38 v46.5,102.38 46.62,102.38 52,107.75 v55,107.75 | v38.38,51.88 33.25,51.88 v32.38,51 32.38,47.25 21.62,36.5 v20.62,36.5 v13.38,36.5
32KHZ  (via drill 0.3)
  Top 0.15: v85.12,60.75 89.62,60.75 R2-PINH1.1 | v77,54.25 75.5,52.75 75.5,52.38 U3.1 75.38,52.25 75.38,51.38 38.25,51.38 37.88,51.75 37.88,57.5 arc90 36.88,58.5 28.25,58.5 19,49.25 19,40.62 18.5,40.12 U2.9
  Bottom 0.15: v85.12,60.75 83.5,60.75 v77,54.25
DN
  Top 0.15: J2.A7 164.5,54.25 165,54.25 165.25,54 165.25,53.38 164.5,53.38 J2.B7 164.38,53.25 163.75,53.25 163.25,52.75 163.25,52.12 149.88,52.12 D1.4
DP
  Top 0.15: 163.62,54.62 163.62,53.88 164.38,53.88 J2.A6 | 163.62,54.62 163.75,54.75 164.38,54.75 J2.B6 | 163.62,54.62 156.75,54.62 156.12,55.25 151.12,55.25 149.88,54 D1.6
EPD_3V3  (via drill 0.3)
  Top 0.3: 81.12,32 81.25,32 81.25,42 82.75,43.5 83.88,43.5 arc-90 84.88,42.5 84.88,39.12 L1.2 | 81.12,32 78.25,32 Q2.2 | J1.16 85.12,16.62 85.5,16.62 J1.15 85.5,16.75 85.5,17.75 v85.62,17.88 | v88.75,21 89.62,21 EPD_C5.1 | v84.88,25 84.88,31.25 84.12,32 C7.1 | v105.88,16.75 107.38,16.75 TP17.TP | v81.12,28.88 81.12,32
  Bottom 0.3: v85.62,17.88 v88.75,21 | v88.75,21 88.75,21.12 v84.88,25 84.88,25.12 v81.12,28.88 | v105.88,16.75 104.75,16.75 100.5,21 v88.75,21
EPD_3V3_C  (via drill 0.3)
  Top 0.3: 76.94,32.81 77.88,33.75 78.12,33.75 Q2.1 | 76.94,32.81 76.12,32 R_CL1.1 | v21.38,56.38 21.38,57.12 21,57.5 U2.18 | v76.88,32.88 76.94,32.81 | v102.25,20 102.25,15.5 104.25,13.5 TP13.TP
  Bottom 0.3: v21.38,56.38 53.38,56.38 v76.88,32.88 89.38,32.88 v102.25,20
EPD_BUSY  (via drill 0.3)
  Top 0.15: v103,17.38 103.88,18.25 109.62,18.25 arc-90 110.62,17.25 110.62,16.62 TP9.TP | J1.9 88.62,16.62 88.75,16.75 v88.75,17.38 88.75,20.38 v88,21.12 | v18.5,42 18.5,49.38 11.38,56.5 11.38,57 10.88,57.5 U2.26
  Bottom 0.15: v103,17.38 v88.75,17.38 | v18.5,42 22.75,42 33.12,52.38 56.75,52.38 v88,21.12
EPD_CS  (via drill 0.3)
  Top 0.15: v87,21.38 v87,17.88 87,16.62 J1.12 | v79.88,27.88 79.12,28.62 D6.2 79,28.75 79,29.38 76.88,29.38 74.5,31.75 R9.1 | v32.5,28.25 21.5,39.25 21.5,39.5 21,40 U2.11 | v108.75,13.5 110.5,13.5 TP10.TP
  Bottom 0.15: v87,21.38 87,21.62 80.75,27.88 v79.88,27.88 79.5,28.25 v32.5,28.25 | v108.75,13.5 107.5,13.5 103.12,17.88 v87,17.88
EPD_DC
  Top 0.15: 87.75,15.5 87.75,16.38 87.62,16.5 J1.11 | 87.75,15.5 91,12.25 104.62,12.25 arc90 105.62,13.25 105.62,13.62 105.5,13.75 105.5,16 104.5,17 TP11.TP | 87.75,15.5 87.75,14 arc-90 86.75,13 80,13 77.12,10.12 77.12,9.3 arc-90 75.2,7.38 32.38,7.38 13.88,25.88 13.88,39.5 13.38,40 U2.5
EPD_RST  (via drill 0.3)
  Top 0.15: 102.12,21.25 101.75,20.88 101.75,15.41 arc-90 99.21,12.88 91,12.88 88.25,15.62 88.25,16.38 88.12,16.5 J1.10 | 102.12,21.25 109.75,21.25 arc-90 112,19 112,13 111.12,12.12 108.38,12.12 arc-90 107.38,13.12 107.38,13.25 TP12.TP | v24.88,59.75 19,59.75 17.62,58.38 17.62,58 17.25,57.62 U2.21 | v62.38,51.88 v54.5,59.75 | 102.12,21.25 v102.12,21.62
  Bottom 0.15: v54.5,59.75 v24.88,59.75 | v62.38,51.88 71.88,51.88 v102.12,21.62
FLASH_CS
  Top 0.15: U1.1 31.5,53.12 32.88,53.12 32.88,44.62 32.5,44.25 D9.2 32.38,44.25 31.75,43.62 31.75,42.88 30.62,42.88 R5.1 30.5,42.75 30.5,39.12 22.88,39.12 22.75,39.25 22.75,39.5 22.25,40 U2.12
GDR  (via drill 0.3)
  Top 0.15: v92,13.38 92,16.5 J1.2 | v73,13.38 72,14.38 R4.1 71.05,15.29 69.34,15.29 Q3.1
  Bottom 0.15: v73,13.38 v92,13.38
GND  (via drill 0.3)
  Top 0.15: D12.1 28.5,21.75 28.5,22 D11.1 28.62,22.12 32.88,22.12 D10.1 33,22.12 33,43.25 | 29.27,50 29.27,44.5 arc90 30.27,43.5 31.12,43.5 31.38,43.75 31.38,49.25 U1.4 | 29.27,50 30.65,51.38 32.12,51.38 32.12,52.25 31.75,52.62 30.75,52.62 30.75,53.5 30.88,53.62 33.25,53.62 | 33.25,53.62 34.25,53.62 arc-90 35.25,52.62 35.25,51.25 U1.9 | 33,43.25 33.25,43.5 33.25,53.62 | 33,43.25 32.5,42.75 D9.1 | D8.1 12.57,99.67 12.57,100.03 11.4,101.2 9.83,101.2 9.62,101 9.62,100.75 v8.5,100.75 7.75,100.75 C9.2 | 3.12,95.38 3.12,95.5 J4.G4 3.12,95.38 | 4.33,93.56 4.33,94.15 4.94,93.53 4.94,93.32 5.06,93.2 5.14,93.2 J4.P6 | 4.33,93.56 4.33,84.58 2.12,82.38 J4.G3 | 3.12,95.38 v4.25,96.5 6.72,98.97 6.72,101.36 7.26,101.9 13.87,101.9 14.08,101.86 14.32,101.86 15.03,101.16 15.03,96.95 17.18,94.8 20.05,94.8 | 4.33,93.56 3.12,95.38 | 12.75,46.12 12.75,47.25 U2.29_2 | 14,46.12 14,47.25 U2.29_5 | 12.75,46.12 13.88,46.12 U2.29_4 14,46.12 | 12.75,46.12 U2.29_1 | 14,46.12 15.12,46.12 U2.29_7 15.25,46.12 15.25,47.25 U2.29_8 15.25,47.38 15.25,48 | 8.75,46.5 8.75,40.62 8.25,40.12 U2.1 | 8.75,46.5 10.75,48.5 12.62,48.5 U2.29_3 12.75,48.62 13.88,48.62 U2.29_6 14,48.62 15.12,48.62 U2.29_9 15.25,48.5 15.25,48 | 8.75,46.5 8.75,57 8.25,57.5 U2.28 8.25,57.62 8.75,58.12 8.75,58.38 12.57,62.2 13.8,62.2 14.32,62.72 14.32,74.45 16.25,76.38 16.25,85.25 J4.G1 16.38,85.38 17.12,86.12 17.12,90.25 16.38,91 J4.G2 16.38,91.12 20.05,94.8 | C6.2 25.88,107.25 25.88,107.5 BOOT_BUTTON.2 25.75,107.62 22.38,107.62 BOOT_BUTTON.1 22.28,107.33 20.25,105.3 20.25,94.8 20.05,94.8 | 29.27,50 v25.25,50 | 15.25,48 v17.25,50
  Top 0.15: C2.2 153,9.5 154.25,9.5 C1.2 154.38,9.5 154.38,11.5 | 154.38,11.5 154.38,11.75 154.62,12 SENSOR2.5 | 155.38,13.62 154.75,13.62 SENSOR2.7 | 155.38,13.62 155.38,12.5 154.38,11.5 | 155.38,13.62 arc-90 156.12,14.38 157.5,14.38 SENSOR2.1 157.62,14.5 157.62,20.7 arc-90 159.3,22.38 164.88,22.38 | 164.88,22.38 166.12,22.38 166.38,22.12 166.38,17.88 165.12,17.88 J3.1 | J2.B12 164.38,51 164.38,50.75 J2.A1 164.5,50.62 164.88,50.25 164.88,49 J2.MP3 | J2.MP3 165,49 168.88,49 J2.MP1 169,49 169,59.12 J2.MP2 168.88,59.12 165,59.12 J2.MP4 164.88,59.12 164.88,57.88 164.5,57.5 J2.A12 164.38,57.38 164.38,57.12 | R2-USB.2 149.5,47.12 149.5,47.88 148.5,48.88 R2-USB1.1 148.38,49 148.25,49.12 148.25,53.62 | 148.25,53.62 arc-90 150.5,55.88 151.62,55.88 C5_USB.2 151.75,56 151.75,56.6 arc-90 152.28,57.12 164.38,57.12 | 148.25,53.62 147.75,53.12 147.38,53.12 D1.2 147.25,53.12 147,53.12 146.62,53.5 144.38,53.5 C4_USB.2 144.25,53.5 141,50.25 132.5,50.25 TP5.TP 132.38,50.25 122.12,50.25 | 128.75,46.75 128.75,46.88 U4.9 | 128.75,46.75 128.75,46.25 127.88,46.25 U4.4 | U4.9 128.75,47 128.75,47.62 127.88,47.62 U4.1 127.75,47.62 127.75,47.5 C2_BAT.2 124.75,47.5 124.75,47.12 122.88,47.55 | 128.75,46.75 129.62,46.75 U4.6 | 128.75,46.75 U4.9 | 122.88,47.55 122,47.12 MCP73831.2 121.88,47.12 121.62,47.12 121,47.75 121,48.25 121.83,49.08 arc45 122.12,49.79 122.12,50.25 | 122.12,50.25 122.12,53.88 120.62,55.38 TP4.TP | 164.38,57.12 J2.B1 | 164.88,22.38 164.88,48.88 J2.MP3 | 67.25,10.75 67.88,10.12 67.88,8.5 SJ1.1 | 67.25,10.75 67.25,15.65 | 67.25,15.65 67.25,18.38 77.5,28.62 D6.1 | 67.25,10.75 R2.1
  Top 0.15: EPD_C1.2 92.38,22.38 91.12,22.38 EPD_C2.2 91,22.38 89.75,22.38 EPD_C5.2 89.62,22.38 86.25,22.38 EPD_C6.2 86.12,22.5 85.38,22.5 | 85.38,22.5 84.88,22.5 EPD_C7.2 84.75,22.5 83.62,22.5 EPD_C8.2 83.5,22.5 82.25,22.5 EPD_C9.2 82.12,22.5 81,22.5 EPD_C10.2 80.88,22.38 75.38,22.38 arc90 74.38,21.38 74.38,19.75 | 85.38,22.5 85.38,32 C7.2 85.38,32.12 91.75,32.12 arc90 92.75,33.12 92.75,35.75 94.88,37.88 97.42,37.88 arc90 98.12,38.58 98.12,40.75 | v84.75,15.75 84.75,16.38 84.62,16.5 J1.17 | v88.75,15.75 89,16 89,16.5 J1.8 | v92.5,14.12 93.5,14.12 J1.MP1 | 78.03,14.8 79.22,14.55 J1.MP2 | 74.38,19.75 74,19.75 EPD_C11.2 | 73.05,19.88 73.88,19.88 EPD_C11.2 | 73.05,19.88 72.62,19.88 EPD_C12.2 | 73.05,15.65 73.05,14.59 R4.2 | v80.88,15.75 78.97,15.75 78.03,14.8 | 74.38,19.75 EPD_C11.2 | 73.05,15.65 67.25,15.65 | C10.2 68.75,107.62 66,107.62 CHANGE_BUTTON.2 65.88,107.62 62.5,107.62 CHANGE_BUTTON.1 62.38,107.5 61.5,106.62 61.5,100.25 61.12,99.88 | 50.48,104.12 arc-90 51.38,103.22 51.38,102.88 C_DELAY.2 | IC1.3 50.48,104.12 | 50.88,107.25 50.48,107.25 50.48,104.12 | 50.88,107.25 53.75,107.25 C5.2 | 50.88,107.25 50.88,107.62 RESET_BUTTON.2 | RESET_BUTTON.2 50.75,107.75 47.38,107.75 RESET_BUTTON.1 47.25,107.62 arc-90 46.5,106.88 44.38,106.88 44.12,106.62 v44.12,100.25 arc90 44.5,99.88 61.12,99.88 | 50.88,107.25 RESET_BUTTON.2 | 90.08,41.25 90.08,49.2 90.38,49.5 | 90.08,41.25 90.08,39.45 90,39.38 D3.1 | 90.38,49.5 91.38,50.5 C10_SUPERCAP.1 | R1_PWRUSB.1 110,34.38 109,35.38 108.5,35.38 C1_BAT2.2 108.38,35.5 108.38,39 | C1_BAT1.2 113.12,32.75 112.5,32.12 110.12,32.12 110.12,34.25 R1_PWRUSB.1
  Top 0.15: R2_BAT.1 118.62,41.75 116.25,44.12 116.25,44.5 C1_BAT.2 | 116.25,35.25 120.62,35.25 arc90 121.62,36.25 121.62,36.38 C3.- 121.62,36.5 121.62,38.75 118.75,41.62 R2_BAT.1 | 116.25,35.25 115.62,35.25 IC4.2 | 116.25,35.25 116.25,36.52 arc90 115.65,37.12 112.88,37.12 110.12,34.38 R1_PWRUSB.1 | 98.12,40.75 106.1,40.75 | 90.08,41.25 97.62,41.25 arc-90 98.12,40.75 | v87.62,49.75 84.75,49.75 C8.2 84.62,49.88 83.62,50.88 83.62,55.88 79.38,60.12 79.38,61.62 U3.13 79.38,61.75 79.38,62.12 80.88,63.62 80.88,64.75 81.12,65 81.12,79.88 61.12,99.88 | 90.38,49.5 v90.12,49.75 | 122.88,47.55 122.75,45.75 118.75,41.75 R2_BAT.1 | 78.03,14.8 74.63,18.19 74.63,18.9 74.38,19.16 74.38,19.75 | 73.05,19.88 72.26,19.08 72.04,19.08 71.92,18.96 71.92,16.85 73.05,15.72 73.05,15.65
  Top 0.152: 106.1,40.75 106.62,40.75 arc-90 108.38,39
  Bottom 0.15: v4.25,96.5 v8.5,100.75 10.62,100.75 11.12,100.25 v44.12,100.25 | v25.25,50 v17.25,50 | v92.5,14.12 90.88,15.75 v88.75,15.75 v84.75,15.75 v80.88,15.75 | v90.12,49.75 v87.62,49.75
  pour Top: 6.96,39.66 6.94,39.64 6.92,39.62 0.08,39.62 0.08,0.08 77.42,0.08 77.42,10.02 77.44,10.04 77.46,10.06 77.48,10.08 95.62,10.08 95.64,10.06 95.66,10.04 95.68,10.02 95.68,0.08 170.12,0.08 170.12,67.12 92.18,67.12 92.16,67.14 92.14,67.16 92.12,67.18 92.12,111.12 69.98,111.12 69.98,110.08 69.96,110.06 69.94,110.04 69.92,110.02 17.28,110.02 17.26,110.04 17.24,110.06 17.22,110.08 17.22,111.12 0.08,111.12 0.08,58.08 6.92,58.08 6.94,58.06 6.96,58.04 6.98,58.02 6.98,39.68
  pour Bottom: 6.96,39.66 6.94,39.64 6.92,39.62 0.08,39.62 0.08,0.08 77.42,0.08 77.42,10.02 77.44,10.04 77.46,10.06 77.48,10.08 95.62,10.08 95.64,10.06 95.66,10.04 95.68,10.02 95.68,0.08 170.12,0.08 170.12,67.12 92.18,67.12 92.16,67.14 92.14,67.16 92.12,67.18 92.12,111.12 69.98,111.12 69.98,110.08 69.96,110.06 69.94,110.04 69.92,110.02 17.28,110.02 17.26,110.04 17.24,110.06 17.22,110.08 17.22,111.12 0.08,111.12 0.08,58.08 6.92,58.08 6.94,58.06 6.96,58.04 6.98,58.02 6.98,39.68
GPIO8
  Top 0.15: R1.2 21.38,37.75 19.75,39.38 19.75,40 U2.10
I2C_PW  (via drill 0.3)
  Top 0.15: 156.75,9.62 160.67,9.62 R2-PINH.2 156.75,10.32 | 156.75,9.62 155.88,9.62 R1_PINH.2 155.75,9.62 154.38,8.25 C1.1 154.25,8.12 153,8.12 C2.1 152.88,8.25 152.25,8.88 152.25,14 | 156.75,10.32 156.75,12.88 arc-90 157.5,13.62 SENSOR2.2 | 156.75,9.62 156.75,10.32 | 153.88,14 153.88,13.62 arc90 154.62,12.88 SENSOR2.6 | 153.88,14 154.25,14.38 154.62,14.38 SENSOR2.8 | v22.75,58.75 22.75,58.12 22.25,57.62 U2.17 | 153.88,14 152.25,14 | 152.25,14 v115.38,14
  Bottom 0.15: v22.75,58.75 23.25,58.75 25.25,56.75 72.62,56.75 v115.38,14
INT_RTC  (via drill 0.3)
  Top 0.15: 80,64.62 80.25,64.38 R1_PINH1.1 80,64.62 | 80,64.62 80,66.88 TP15.TP | v17.62,41.75 17.62,40.5 17.25,40.12 U2.8 | v49.88,55.75 58.75,64.62 77.5,64.62 | 80,64.62 77.5,64.62 | 77.5,64.62 77.5,52.88 78,52.38 U3.3
  Bottom 0.15: v17.62,41.75 31.62,55.75 v49.88,55.75
IO/BOOT
  Top 0.15: R_BOOT.1 20.12,106.25 21.38,107.5 21.38,108.25 22.25,109.12 BOOT_BUTTON.4 22.38,109.12 25.75,109.12 BOOT_BUTTON.3 25.88,109 28,109 29.25,107.75 29.25,106.62 28.62,106 C6.1 28.5,105.88 25.38,102.75 25.38,58.25 24.75,57.62 U2.15
IO/CHANGE  (via drill 0.3)
  Top 0.15: C10.1 69.62,107 69.62,108 68.62,109 66,109 CHANGE_BUTTON.3 65.88,109.12 62.5,109.12 CHANGE_BUTTON.4 62.38,109.12 61.12,107.88 61.12,100.38 v46.62,100.38 46,101 46,105 44.88,106.12 R_CHANGE.1 | U2.23 15.12,58.12 v15.12,59.62
  Bottom 0.15: v15.12,59.62 15.12,68.88 v46.62,100.38
MISO  (via drill 0.3)
  Top 0.15: J4.P7 6,93.75 arc90 7,94.75 7,101.25 7.38,101.62 13.75,101.62 arc-90 14.75,100.62 14.75,76.62 14,75.88 TP6.TP 13.88,75.75 13.62,75.5 v13.62,62.63 | R8.1 24.5,17.75 D12.2 23.5,21.25 23.5,36.62 v22.25,37.88 | v25.25,52 31.38,52 U1.2 | v14.88,52 9.62,57.25 9.62,57.5 U2.27 9.62,57.62 9.62,58.5 v9.88,58.75
  Bottom 0.15: v14.88,52 16.75,52 | 16.75,52 v25.25,52 | v22.25,37.88 20.88,37.88 16.75,42 16.75,52 | v9.88,58.75 13.62,62.5 v13.62,62.63
MOSI  (via drill 0.3)
  Top 0.15: v86,15.25 86,16.5 J1.14 | U1.5 39.12,49.25 34.38,44.5 34.38,18.12 33.38,17.12 v29.5,17.12 28.75,17.12 28.75,17.62 R7.1 28.62,17.75 28.62,20.5 D11.2 | v16.38,30.25 16.38,39.5 15.88,40 U2.7 | v7.5,39.12 7.5,73.88 9.25,75.62 TP7.TP 9.25,75.75 4.88,80.12 4.88,88.25 5.89,89.27 J4.P3
  Bottom 0.15: v86,15.25 31.38,15.25 v29.5,17.12 v16.38,30.25 v7.5,39.12
N$2
  Top 0.15: IC1.5 46.88,101.25 48.5,101.25 arc-90 48.88,100.88 49,100.75 50.62,100.75 arc90 51.38,101.5 C_DELAY.1
N$4  (via drill 0.3)
  Top 0.15: v78.12,16.62 81,16.62 J1.24 | v72.75,16.62 72.62,16.75 72.62,18.5 EPD_C12.1
  Bottom 0.15: v72.75,16.62 v78.12,16.62
N$5
  Top 0.15: CHG_LED.C 115.75,47.25 115,46.5 111.88,46.5 111.88,47.12 R1_BAT.1
N$6
  Top 0.15: EPD_C6.1 84.25,19.25 84.25,16.75 84.12,16.62 J1.18
N$7
  Top 0.15: R_CAPACITOR.2 88.12,51.88 83.62,56.38 83.62,64.25 83.5,64.38 D7.1
N$8
  Top 0.15: J1.20 83.12,16.62 83.25,16.75 83.25,20.88 EPD_C8.1
N$9
  Top 0.15: J1.4 91.12,16.62 91.25,16.75 91.25,19.88 92.38,21 EPD_C1.1
N$10
  Top 0.15: R1_BAT.2 113.12,47.25 114.62,47.25 arc90 115.12,47.75 115.25,47.88 116.62,47.88 116.62,46.75 116.75,46.62 121.12,46.62 121.62,46.12 121.88,46.12 MCP73831.1
N$12
  Top 0.15: R2_BAT.2 118.75,43 119.25,43.5 119.25,46 MCP73831.5
N$13
  Top 0.15: D3.2 93.5,39.25 arc90 94.12,38.62 97,38.62 C4.1 97.12,38.62 97.75,39.25 97.75,40.17 arc90 97.55,40.38 91.12,40.38 90.75,40 90.75,36 90.12,35.38 D4.1
N$16
  Top 0.15: J1.5 90.62,16.62 90.75,16.75 90.75,20.75 91,21 EPD_C2.1
N$18
  Top 0.15: J1.19 83.62,16.62 83.75,16.75 83.75,20 84.75,21 EPD_C7.1
N$19
  Top 0.15: J1.22 82,16.62 82,20.12 81,21.12 EPD_C10.1
N$20
  Top 0.15: 114.88,34.25 115.5,34.25 IC4.3 115.62,34.38 117.62,34.38 117.62,34.62 117.88,34.88 123.88,34.88 arc-90 124.75,34 D2.1 124.88,34 127,36.12 127,41.38 Q1.2 | 114.88,34.25 113.25,34.25 111.88,32.88 C1_BAT1.1 | 114.88,34.25 114.88,36.12 115.5,36.12 IC4.1
N$21
  Top 0.15: R2-USB1.2 149.75,49 160.62,49 163.62,52 163.62,52.62 163.75,52.75 164.38,52.75 J2.A5
N$29  (via drill 0.3)
  Top 0.15: v148.88,47.88 148.88,47.62 148.38,47.12 R2-USB.1 | v156.75,55.75 164.38,55.75 J2.B5
  Bottom 0.15: v156.75,55.75 v148.88,47.88
PREVGH  (via drill 0.3)
  Top 0.15: J1.21 82.5,16.62 v82.5,20.38 82.5,20.88 82.25,21.12 EPD_C9.1 | v81.62,26.38 81.62,41 83.38,42.75 D5.1
  Bottom 0.15: v81.62,26.38 81.62,21.25 v82.5,20.38
PREVGL
  Top 0.15: EPD_C11.1 74,18.38 74,14.38 arc90 75,13.38 80.38,13.38 81.5,14.5 81.5,16.5 J1.23 81.5,16.62 81.5,17.12 80.12,18.5 80.12,21.25 arc-90 80.62,21.75 85.38,21.75 85.5,21.88 87.12,21.88 87.25,21.75 93,21.75 93.12,21.88 93.12,34.88 93.5,35.25 D4.2
RESE  (via drill 0.3)
  Top 0.15: v91.5,14.38 91.5,16.5 J1.3 | Q3.2 70,14.5 70,14.38 v70.62,14.38 72.25,12.75 72.25,9.38 71.62,8.75 R3.1
  Bottom 0.15: v70.62,14.38 v91.5,14.38
RESE'
  Top 0.15: 69.38,10 68.62,10.75 R2.2 | 69.38,10 69.38,8.5 SJ1.2 | 69.38,10 71.5,10 R3.2
RESET  (via drill 0.3)
  Top 0.15: RESET_BUTTON.4 47.38,109.25 50.75,109.25 RESET_BUTTON.3 50.88,109.12 53.5,109.12 arc-90 54.5,108.12 54.5,106.38 | IC1.1 49.62,101.38 v50.38,101.38 50.75,101.38 50.75,102 51,102.25 52.75,102.25 arc90 53.75,103.25 53.75,105.75 C5.1 53.88,105.88 arc-90 54.38,106.38 54.5,106.38 | 54.5,106.38 60.12,106.38 R_RESET.1 | v10.88,48 10.88,40.12 U2.3
  Bottom 0.15: v10.88,48 10.88,54.75 50.38,94.25 v50.38,101.38
RTC_RST  (via drill 0.3)
  Top 0.15: v24,58.75 24,58.12 23.5,57.62 U2.16 | v78,57.12 79.25,55.88 79.25,52.38 U3.4
  Bottom 0.15: v24,58.75 27,58.75 28.62,57.12 v78,57.12
RX
  Top 0.15: U2.24 13.38,57.62 13.88,58.12 13.88,59 15,60.12 16.88,60.12 arc90 17.88,61.12 17.88,61.38 TP2.TP
SCK  (via drill 0.3)
  Top 0.15: U1.6 39.12,50.5 34,45.38 34,21.62 33,20.62 D10.2 33,20.5 33,18.12 | v86.5,17.38 86.5,16.62 J1.13 | 33,18.12 v33.75,18.12 | 33,18.12 33,17.88 R6.1 33,18.12 | v15.88,35.75 15.12,36.5 15.12,39.5 14.62,40 U2.6 | v6.88,58.62 6.88,73.62 4.75,75.75 TP8.TP 4.62,75.88 4.6,75.9 4.6,90.75 5.36,91.5 5.84,91.5 J4.P5
  Bottom 0.15: v86.5,17.38 34.5,17.38 v33.75,18.12 16.12,35.75 v15.88,35.75 13.5,35.75 7.38,41.88 7.38,58.12 v6.88,58.62
SCL  (via drill 0.3)
  Top 0.15: v19.75,59.25 19,58.5 19,58.12 18.5,57.62 U2.20 | v56.38,61.62 75.38,61.62 U3.16 75.5,61.62 75.88,61.25 v75.88,54.12 | 157.88,11.75 157.62,12 SENSOR2.4 | v130.62,47.12 129.75,47.12 U4.7 | 164.62,21.25 165,20.88 J3.4 | 164.62,21.25 v164.38,21.5 | 164.62,21.25 163.12,19.75 163.12,14.29 arc-90 160.59,11.75 157.88,11.75 | 157.88,11.75 159.49,10.14 160.04,10.04 160.04,10.08 160.16,10.2 161.22,10.2 161.34,10.08 161.34,9.22 160.69,8.56 R2-PINH.1
  Bottom 0.15: v19.75,59.25 23.62,59.25 26,61.62 v56.38,61.62 | v164.38,21.5 138.75,47.12 v130.62,47.12 127.25,47.12 126.5,47.88 82.12,47.88 v75.88,54.12
SDA  (via drill 0.3)
  Top 0.15: v32.12,62.88 25.12,55.88 21.12,55.88 20.25,56.75 20.25,57 19.75,57.5 U2.19 | v76.12,62.88 76.62,62.38 76.62,61.75 U3.15 76.75,61.62 77,61.38 v77,60.25 | R1_PINH.1 155.88,8.25 156.5,7.62 160.96,7.62 arc90 163.5,10.16 163.5,19.5 v164,20 165,20 165,19.88 J3.3 165.12,19.88 165.5,19.88 166,20.38 166,22 164.25,22 162.75,20.5 162.75,13.66 161.97,12.88 157.57,12.88 SENSOR2.3 | v127,48 129.38,48 arc-90 129.62,47.75 U4.8 129.85,47.55 130.8,47.55 131.05,47.3 131.05,46.95 v131.88,46.12
  Bottom 0.15: v76.12,62.88 v32.12,62.88 | v131.88,46.12 137.88,46.12 v164,20 | v77,60.25 82.5,60.25 83.5,61.25 113.75,61.25 v127,48
SRC
  Top 0.15: 84.88,34.62 87.75,34.62 | 87.75,34.62 90.75,34.62 91.12,35 91.12,38.88 arc-90 92.12,39.88 97,39.88 C4.2 | 84.88,34.62 83.38,33.12 83.38,26.88 arc-90 82.38,25.88 77.38,25.88 71.64,20.14 71.64,19.04 Q3.3 | 84.88,34.62 L1.1 | 87.75,34.62 87.75,42 87,42.75 D5.2
SS_SD  (via drill 0.3)
  Top 0.15: 11.75,98 10.5,99.25 R10.1 | 11.75,98 12.88,98 arc90 13.88,99 13.88,99.5 D8.2 | v11.5,46.75 11.5,40.62 12,40.12 U2.4 | 6.38,88.25 v7.75,86.88 | 11.75,98 8,94.25 8,89.88 6.38,88.25 | 6.38,88.25 J4.P2
  Bottom 0.15: v11.5,46.75 7.75,50.5 v7.75,86.88
TX
  Top 0.15: U2.25 12.12,57.62 12.62,58.12 12.62,58.88 15.12,61.38 TP1.TP
USB_D+  (via drill 0.3)
  Top 0.15: v90.75,61.75 137.25,61.75 145,54 147.25,54 D1.1 | v30.25,57.62 24.75,52.12 U2.14
  Bottom 0.15: v90.75,61.75 57.62,61.75 53.5,57.62 v30.25,57.62
USB_D-  (via drill 0.3)
  Top 0.15: v145.25,52.12 147.25,52.12 D1.3 | v29.62,57.62 23.5,51.5 23.5,40.12 U2.13
  Bottom 0.15: v145.25,52.12 123.38,52.12 113.25,62.25 57.62,62.25 53.5,58.12 30.12,58.12 v29.62,57.62
VBAT
  Top 0.15: U4.2 127.88,47.12 127.88,46.75 U4.3 127.75,46.62 125.25,46.62 arc90 124.88,46.25 C2_BAT.1 124.88,46.12 125.7,45.3 | 125.7,45.3 126.2,44.8 135.06,44.8 TP3.TP 132.38,47.5 132.38,47.62 arc90 131.38,48.62 124.88,48.62 124.25,48 MCP73831.3 | 125.7,45.3 125.7,44.02 Q1.3
VBUS  (via drill 0.3)
  Top 0.3: 119.25,47.38 117.25,47.38 CHG_LED.A 117.25,47.5 117,47.75 117,48 116.75,48.25 111.92,48.25 arc90 111.12,47.45 111.12,46.62 114.75,43 114.88,43 | 119.25,47.38 119.25,48 MCP73831.4 119.38,48.12 120.75,49.5 120.75,51.62 TP14.TP | 114.88,43 114.88,44.5 C1_BAT.1 | 114.88,43 114.88,40.38 110.12,35.62 R1_PWRUSB.2 | D2.2 124.88,36.12 125.12,36.38 125.12,41.38 Q1.1 | C5_USB.1 151.62,54.62 150.75,53.75 150.75,53.5 150.38,53.12 149.88,53.12 D1.5 149.75,53 v148.75,53 | 145.25,51.38 144.38,52.25 C4_USB.1 | 145.25,51.38 145.25,43.5 PFMF.050.1.2 145.12,43.5 145.12,42.75 126.5,42.75 125.25,41.5 Q1.1 | 145.25,51.38 v147.12,51.38 | v119.38,47.12 119.25,47.25 119.25,47.38 | v124.38,42.12 125,41.5 Q1.1
  Bottom 0.3: v147.12,51.38 v148.75,53 | v124.38,42.12 v119.38,47.12
VRTC
  Top 0.15: C10_SUPERCAP.2 91.38,52.75 89.88,52.75 arc90 88.88,51.75 88.88,51.12 88.25,50.5 R_CAPACITOR.1 88.62,50.03 87.7,49.11 84.02,49.11 83.38,49.75 C8.1 83.25,49.88 82.5,50.62 82.5,53.25 78.75,57 78.75,61 78.12,61.62 U3.14
VUSB
  Top 0.3: J2.A9 164.38,56.5 164.38,56.38 J2.B4 164.5,56.25 165.12,56.25 165.62,55.75 165.62,52.48 arc-90 165.03,51.88 164.5,51.88 J2.B9 164.38,51.75 164.38,51.62 J2.A4 164.25,51.62 163.75,51.62 155.62,43.5 149.88,43.5 PFMF.050.1.1

## Text on the board
tPlace: Serial No: | OpenBook v1.1